# Altium PCB PCB.PcbDoc
Units mm, origin at the board's own origin, x right, y up, seen from the top; angles counter-clockwise.
Board outline 57 x 32 mm, 2 copper layers (Top Layer, Bottom Layer); 6 components, 3 nets, 62 pads, 4 vias.
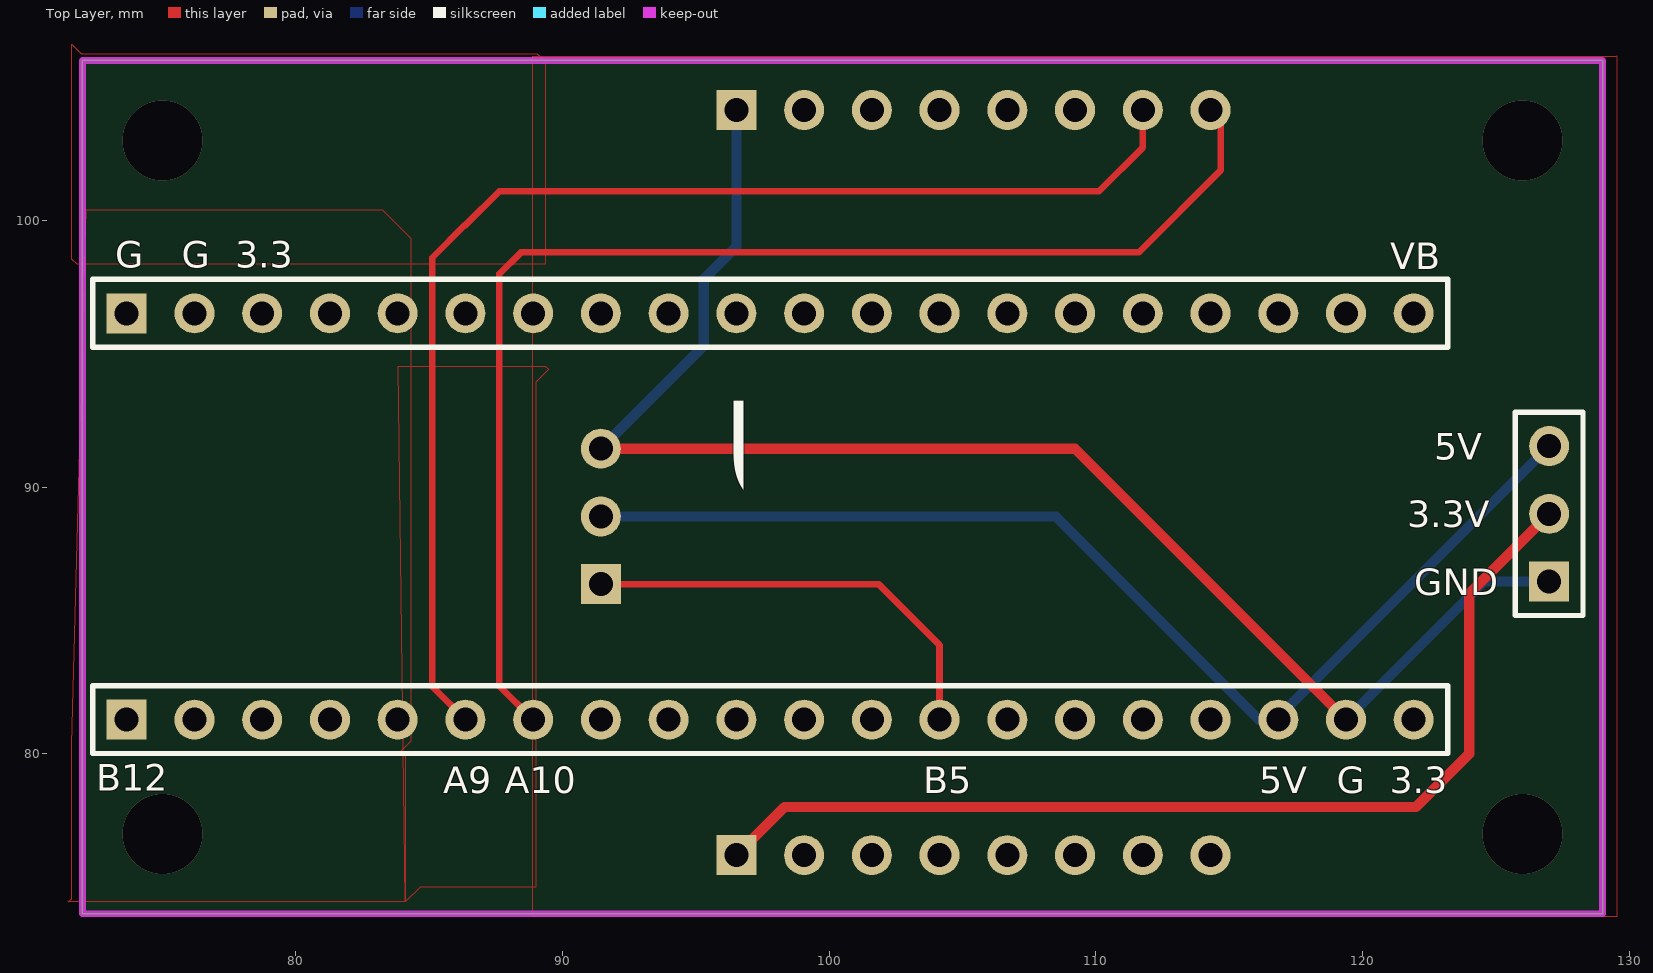
[diagram p0: Top Layer view]
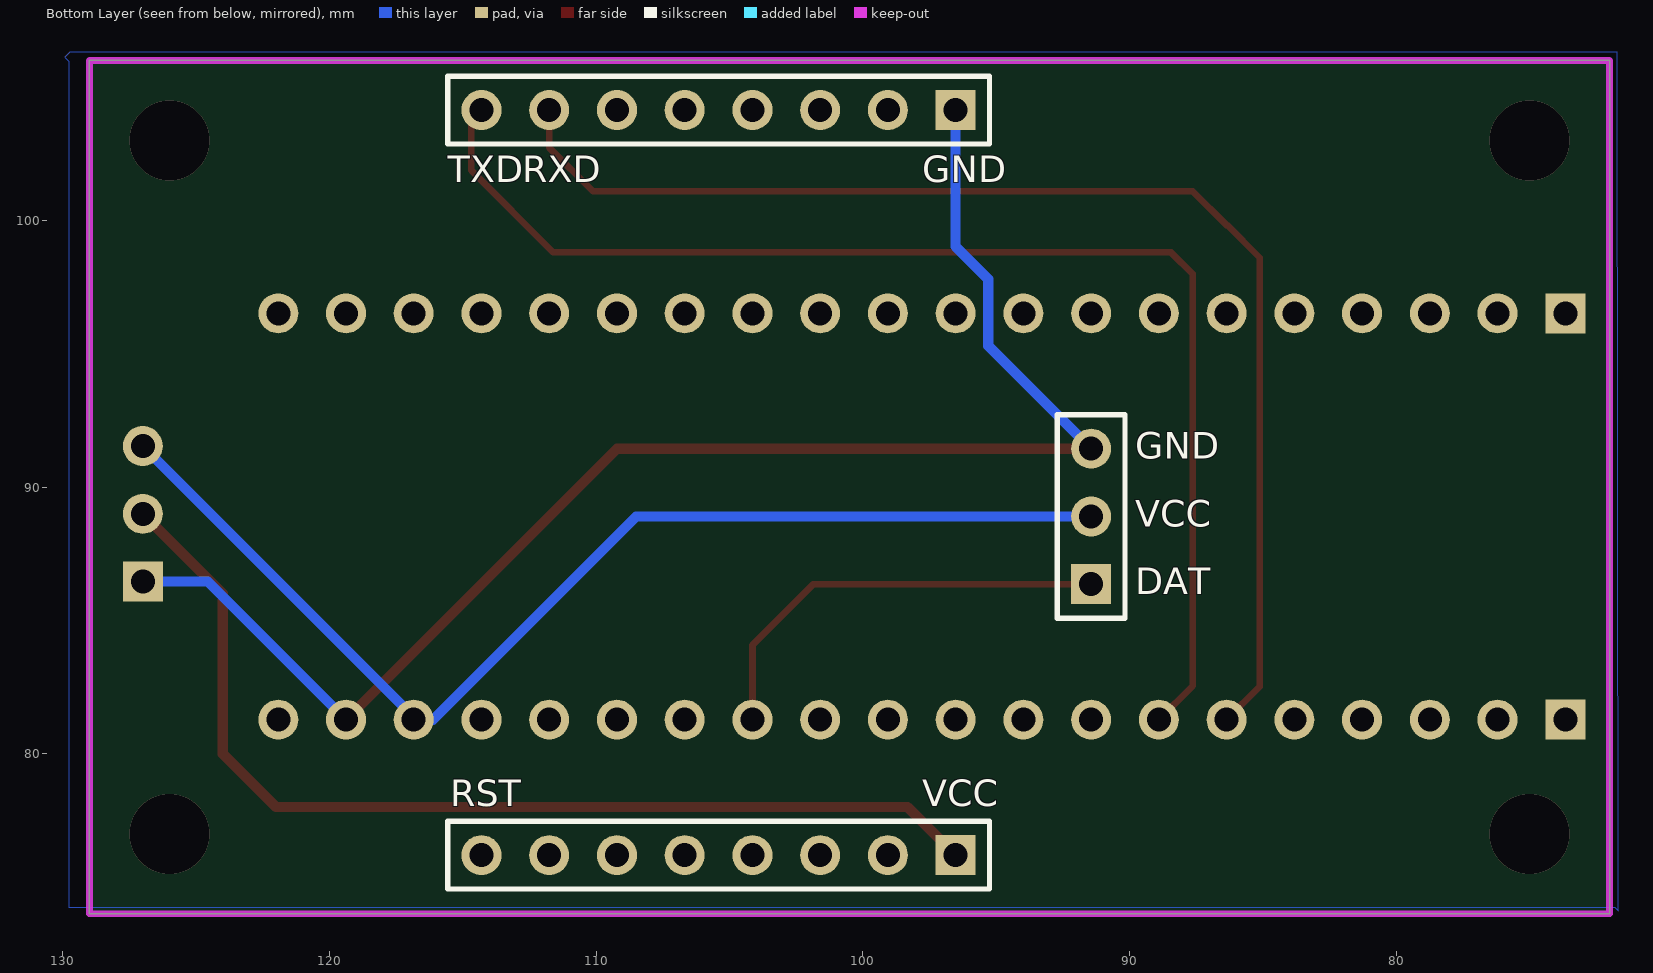
[diagram p1: Bottom Layer view, seen from below]

## Layer stack, top to bottom
Top Solder: solder mask 0.0102, Solder Resist, Dk 3.5
Top Layer: signal copper 0.0356
Dielectric 1: dielectric 0.32, FR-4, Dk 4.8
Bottom Layer: signal copper 0.0356
Bottom Solder: solder mask 0.0102, Solder Resist, Dk 3.5

## Board outline
72,74 72,106 129,106 129,74

## Design rules (kind name [scope] priority, off if disabled: settings)
Clearance [All] p1: gap=0.254 ignorepadtopadclearanceinfootprint=FALSE except(0: Arc-Hole Track-Hole SMDPad-Hole THPad-Hole Via-Hole Fill-Hole Poly-Hole Region-Hole Text-Hole)
PlaneConnect [All] p1: planeconnectstyle=Direct reliefexpansion=0.508 reliefentries=4 reliefconductorwidth=0.254 reliefairgap=0.254
PolygonConnect [All] p1: connectstyle=Relief reliefconductorwidth=0.254 reliefentries=4 polygonreliefangle="90 Angle" airgapwidth=0.254
RoutingVias [All] p1: holewidth=0.711 width=1.27 viastyle="Through Hole" minholewidth=0.711 minwidth=1.27 maxholewidth=0.711 maxwidth=1.27
SolderMaskExpansion [All] p1: expansion=0.102 istentingtop=FALSE
Width [All] p1: maxlimit=0.5 minlimit=0.254 preferedwidth=0.5
29 further rules are at their usual default settings.

## Components (designator, comment, footprint, x,y, rotation, side; value= is the part's Value field where it differs from the comment)
? "Comment" HDR1X3 127,86.46 r90 top
? "Comment" HDR1X3 91.44,86.36 r90 bottom
? "Comment" HDR1X8 96.52,76.2 r0 bottom
? "Comment" HDR1X8 96.52,104.14 r0 bottom
? "Comment" HDR1X20 73.66,96.52 r0 top
? "Comment" HDR1X20 73.66,81.28 r0 top

## Footprints (in the part's own frame and the unit in brackets; to place one, negate y for a bottom-side part, rotate by r counter-clockwise, add the part's x,y. Pads: shape width x height; smd on the part's side, far side on the other; paste and mask are expansions set on the pad)
HDR1X3 [mm] "Connector; Header; 3 Position"
  rect 1.5x1.5 hole 0.9: 1(0,0)
  round 1.5 hole 0.9: 2(2.54,0) 3(5.08,0)
  silkscreen extent -1.27,-1.27 6.35,1.27
HDR1X8 [mm] "Connector; Header; 8 Position"
  rect 1.5x1.5 hole 0.9: 1(0,0)
  round 1.5 hole 0.9: 2(2.54,0) 3(5.08,0) 4(7.62,0) 5(10.16,0) 6(12.7,0) 7(15.24,0) 8(17.78,0)
  silkscreen extent -1.27,-1.27 19.05,1.27
HDR1X20 [mm] "Connector; Header; 20 Position"
  rect 1.5x1.5 hole 0.9: 1(0,0)
  round 1.5 hole 0.9: 2(2.54,0) 3(5.08,0) 4(7.62,0) 5(10.16,0) 6(12.7,0) 7(15.24,0) 8(17.78,0) 9(20.32,0) 10(22.86,0) 11(25.4,0) 12(27.94,0) 13(30.48,0) 14(33.02,0) 15(35.56,0) 16(38.1,0) 17(40.64,0) 18(43.18,0) 19(45.72,0) 20(48.26,0)
  silkscreen extent -1.27,-1.27 49.53,1.27

## Via types
v1: diameter 3, hole 3, Top Layer to Bottom Layer, 4 vias

## Nets (pads, with @x,y where several pads share a name; then routed paths per layer and width w, separated by ;. In a path a pad name is that pad's centre, name@x,y a point inside that pad or via, vN(x,y) a via of type N, cw(c..) or ccw(c..) an arc to the next point about the centre after c; other vN are vias at no path point)
3.3V: ?.1@96.52,76.2 ?.2@127,89 | length 39.6
  Top Layer w0.381: ?.1@96.52,76.52 96.52,76.2 98.32,78 122,78 124,80 124,86 ?.2@127,89
5V: ?.2@91.44,88.9 ?.3@127,91.54 ?.18@116.84,81.28 | length 43
  Bottom Layer w0.381: ?.2@91.44,88.9 108.5,88.9 116.12,81.28 116.84,81.28 116.84,81.38 ?.3@127,91.54
GND: ?.1@96.52,104.14 ?.1@127,86.46 ?.3@91.44,91.44 ?.19@119.38,81.28 | length 56.7
  Top Layer w0.381: ?.3@91.44,91.44 109.22,91.44 ?.19@119.38,81.28
  Bottom Layer w0.381: ?.3@91.44,91.44 95.3,95.3 95.3,97.8 96.52,99.02 ?.1@96.52,104.14 ; ?.19@119.38,81.28 124.56,86.46 ?.1@127,86.46
pads on no net: ?.1@73.66,81.28 ?.1@73.66,96.52 ?.1@91.44,86.36 ?.2@76.2,81.28 ?.2@76.2,96.52 ?.2@99.06,76.2 ?.2@99.06,104.14 ?.3@78.74,81.28 ?.3@78.74,96.52 ?.3@101.6,76.2 ?.3@101.6,104.14 ?.4 ?.5 ?.6 ?.7 ?.8 ?.9 ?.10 ?.11 ?.12 ?.13 ?.14 ?.15 ?.16 ?.17 ?.18@116.84,96.52 ?.19@119.38,96.52 ?.20
copper on no net: | length 112.4
  Top Layer w0.254: 86.36,81.28 85.115,82.525 85.115,95.275 85.115,98.603 86.335,99.822 86.36,99.822 87.63,101.092 110.109,101.092 111.76,102.743 111.76,104.14 ; 88.9,81.28 87.63,82.55 87.63,97.993 88.443,98.806 90.424,98.806 111.608,98.806 114.681,101.879 114.681,103.759 114.3,104.14 ; 91.44,86.36 101.854,86.36 104.14,84.074 104.14,81.28
  other v1: 75,77 126,77 75,103 126,103

## Polygon pours and split planes (outlines as drawn)
no net on Bottom Layer "GND_L02_P-001" (solid, shelved, pour order 1): 71.704,106.299 129.743,106.299 129.921,106.121 129.769,105.969 129.769,74.244 71.806,74.244 71.679,74.117
no net on Top Layer "GND_L02_P-001" (solid, shelved, pour order 2): 71.603,106.604 71.958,106.248 89.052,106.248 89.357,105.943 89.357,98.349 71.806,98.349 71.603,98.552
no net on Top Layer "GND_L02_P-001" (solid, shelved, pour order 0): 88.888,106.155 129.502,106.155 129.528,106.18 129.528,73.897 88.888,73.897
no net on Top Layer "GND_L02_P-001" (solid, shelved, pour order 3): 72.136,100.406 83.236,100.406 84.303,99.339 84.303,80.467 83.922,80.086 84.099,79.908 84.099,74.447 71.476,74.447 71.603,74.574 71.603,80.34
no net on Top Layer "GND_L02_P-001" (solid, shelved, pour order 4): 83.845,94.539 89.357,94.539 89.484,94.412 89.002,93.929 89.002,75.006 84.658,75.006 84.099,74.447

## Keep-outs
Keep-Out Layer:
  the board outline again, w0.254

## Silkscreen, mask and mechanical layers (free items; w line width, h text height)
Top Overlay:
  text "G" at 73.227,98.227 h1
  text "G" at 75.727,98.227 h1
  text "3.3" at 77.727,98.227 h1
  text "VB" at 121.031,98.171 h1
  text "B" at 89.209,93.965 h38 r270
  text "5V" at 122.695,91.031 h1
  text "3.3V" at 121.679,88.491 h1
  text "GND" at 121.933,85.951 h1
  text "B12" at 72.517,78.613 h1
  text "A9" at 85.527,78.527 h1
  text "A10" at 87.827,78.527 h1
  text "B5" at 103.527,78.527 h1
  text "5V" at 116.127,78.527 h1
  text "G" at 119.027,78.527 h1
  text "3.3" at 121.027,78.527 h1
Bottom Overlay:
  text "GND" at 97.773,101.427 h1
  text "RXD" at 112.773,101.427 h1
  text "TXD" at 115.573,101.427 h1
  text "GND" at 89.789,91.059 h1
  text "VCC" at 89.789,88.519 h1
  text "DAT" at 89.789,85.979 h1
  text "VCC" at 97.773,78.027 h1
  text "RST" at 115.473,78.027 h1